# Altium PCB YingHuoDispaly.PcbDoc
Units mil, origin at the board's own origin, x right, y up, seen from the top; angles counter-clockwise.
Board outline 9842.52 x 1574.8 mil, 2 copper layers (Top Layer, Bottom Layer), stack 65.792 mil thick; 22 components, 10 nets, 58 pads, 112 vias.
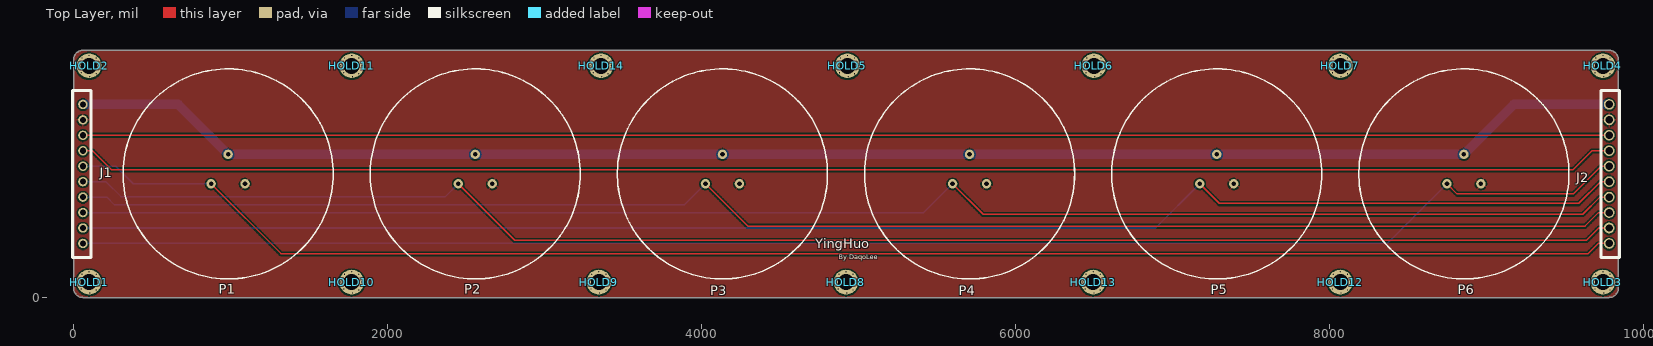
[diagram p0: Top Layer view]
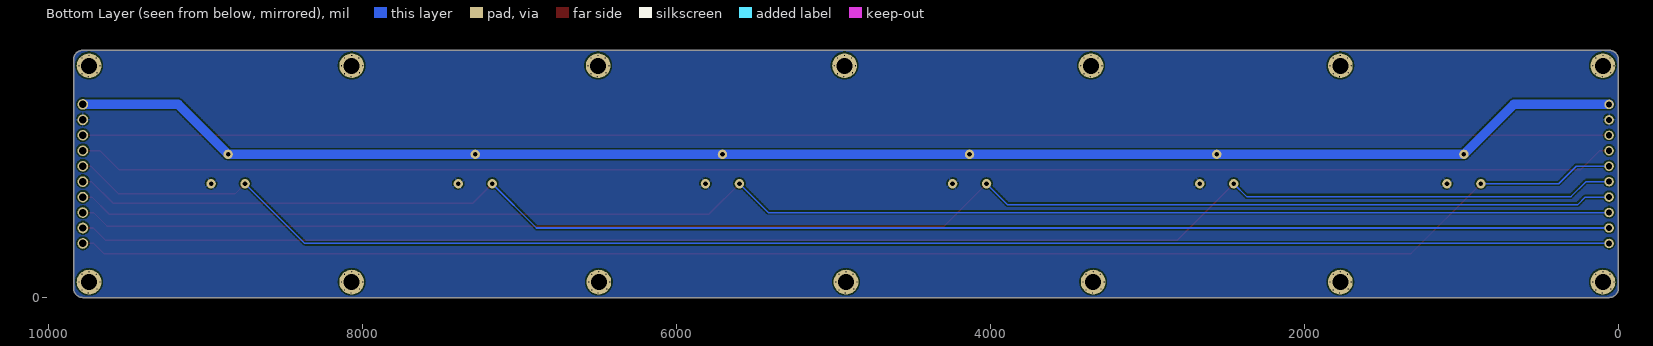
[diagram p1: Bottom Layer view, seen from below]
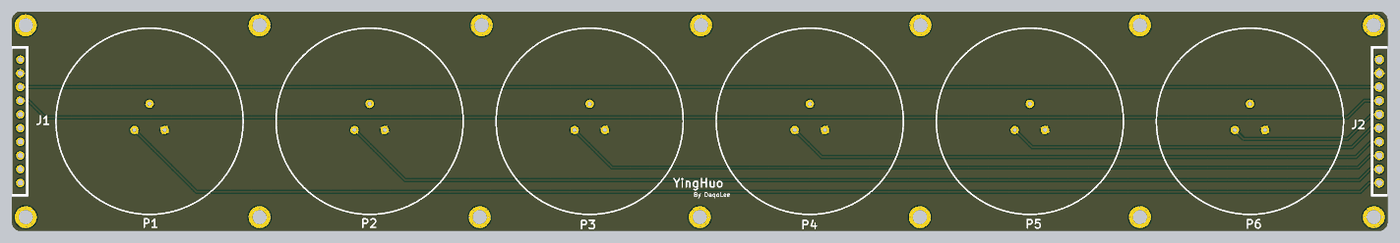
[diagram p2: 3D render of the assembled board from above, using the file's embedded part models]

## Layer stack, top to bottom
Top Solder: solder mask 0.4, Solder Resist, Dk 3.5
Top Layer: signal copper 1.4
Dielectric 1: dielectric 62.9921, FR-4, Dk 4.8
Bottom Layer: signal copper 1.4
Bottom Solder: solder mask 0.4, Solder Resist, Dk 3.5

## Board outline
0,59.06 0,1515.75 cw(c59.06,1515.75) 59.06,1574.8 9783.46,1574.8 cw(c9783.46,1515.75) 9842.52,1515.75 9842.52,59.06 cw(c9783.46,59.06) 9783.46,0 59.06,0 cw(c59.06,59.06)

## Design rules (kind name [scope] priority, off if disabled: settings)
Clearance [All] p1: gap=10 ignorepadtopadclearanceinfootprint=FALSE except(0: Arc-Hole Track-Hole SMDPad-Hole THPad-Hole Via-Hole Fill-Hole Poly-Hole Region-Hole Text-Hole)
PlaneClearance [All] p1: clearance=5
PolygonConnect [All] p1: connectstyle=Relief reliefconductorwidth=10 reliefentries=4 polygonreliefangle="90 Angle" airgapwidth=10
RoutingVias [All] p1: holewidth=28 width=50 viastyle="Through Hole" minholewidth=28 minwidth=50 maxholewidth=28 maxwidth=50
SolderMaskExpansion [All] p1: expansion=4
Width Width_1 [InNet('VCC')] p1: maxlimit=60 minlimit=10 preferedwidth=30
Width [All] p2: maxlimit=10 minlimit=10 preferedwidth=10
29 further rules are at their usual default settings.

## Components (designator, comment, footprint, x,y, rotation, side; value= is the part's Value field where it differs from the comment)
HOLD1 "M2.5" Hold_M2.5S 98.43,98.43 r90 top
HOLD2 "M2.5" Hold_M2.5S 98.43,1476.38 r90 top
HOLD3 "M2.5" Hold_M2.5S 9744.09,98.43 r90 top
HOLD4 "M2.5" Hold_M2.5S 9744.09,1476.38 r90 top
HOLD5 "M2.5" Hold_M2.5S 4930.43,1476.38 r90 top
HOLD6 "M2.5" Hold_M2.5S 6500.65,1476.38 r90 top
HOLD7 "M2.5" Hold_M2.5S 8070.87,1476.38 r90 top
HOLD8 "M2.5" Hold_M2.5S 4921.26,98.43 r90 top
HOLD9 "M2.5" Hold_M2.5S 3346.46,98.43 r90 top
HOLD10 "M2.5" Hold_M2.5S 1771.65,98.43 r90 top
HOLD11 "M2.5" Hold_M2.5S 1771.65,1476.38 r90 top
HOLD12 "M2.5" Hold_M2.5S 8070.87,98.43 r90 top
HOLD13 "M2.5" Hold_M2.5S 6496.06,98.43 r90 top
HOLD14 "M2.5" Hold_M2.5S 3360.22,1476.38 r90 top
J1 "J" JL-B01M-10#1 59.06,787.4 r90 top
J2 "J" JL-B01M-10#2 9783.46,787.4 r270 top
P1 "HDR1x3_1.27" YINGHUOPIN_3 984.25,787.4 r180 top
P2 "HDR1x3_1.27" YINGHUOPIN_3 2559.06,787.4 r180 top
P3 "HDR1x3_1.27" YINGHUOPIN_3 4133.86,787.4 r180 top
P4 "HDR1x3_1.27" YINGHUOPIN_3 5708.66,787.4 r180 top
P5 "HDR1x3_1.27" YINGHUOPIN_3 7283.46,787.4 r180 top
P6 "HDR1x3_1.27" YINGHUOPIN_3 8858.27,787.4 r180 top

## Footprints (in the part's own frame and the unit in brackets; to place one, negate y for a bottom-side part, rotate by r counter-clockwise, add the part's x,y. Pads: shape width x height; smd on the part's side, far side on the other; paste and mask are expansions set on the pad)
Hold_M2.5S [mm]
  round 4 hole 2.6: 0(0,0)
JL-B01M-10#1 [mil]
  round 60 hole 39.37: 1(-442.91,0) 2(-344.49,0) 3(-246.06,0) 4(-147.64,0) 5(-49.21,0) 6(49.21,0) 7(147.64,0) 8(246.06,0) 9(344.49,0) 10(442.91,0)
  silkscreen extent -531,-51 531,67, body extent -533,-51 2125,295, height 174
JL-B01M-10#2 [mil]
  round 67.87 hole 47.24: 1(-442.91,0) 2(-344.49,0) 3(-246.06,0) 4(-147.64,0) 5(-49.21,0) 6(49.21,0) 7(147.64,0) 8(246.06,0) 9(344.49,0) 10(442.91,0)
  silkscreen extent -531,-51 531,67, body extent -533,-51 2125,295, height 174
YINGHUOPIN_3 [mil]
  round 60 hole 30: 1(0,-125) 1(0,-125) 2(108.25,62.5) 3(-108.25,62.5)
  silkscreen extent -669,-669 669,669, body extent -229,-230 228,227, height 290

## Part data
HOLD1 HOLD2 HOLD3 HOLD4 HOLD5 HOLD6 HOLD7 HOLD8 HOLD9 HOLD10 HOLD11 HOLD12 HOLD13 HOLD14: library part Hold_M3
J1 J2: library part HDR1x10
P1 P2 P3 P4 P5 P6: "Header"

## Via types
v1: diameter 15.75, hole 7.87, Top Layer to Bottom Layer, tented both sides, 112 vias

## Nets (pads, with @x,y where several pads share a name; then routed paths per layer and width w, separated by ;. In a path a pad name is that pad's centre, name@x,y a point inside that pad or via, vN(x,y) a via of type N, cw(c..) or ccw(c..) an arc to the next point about the centre after c; other vN are vias at no path point)
GND: J1.9 J2.2 P1.3 P2.3 P3.3 P4.3 P5.3 P6.3
L1: J1.6 J2.10 P1.2 | length 9981.7
  Top Layer w10: P1.2 1320.9,280 9650,280 9714.49,344.49 J2.10
  Bottom Layer w10: J1.6 268.39,836.61 380.1,724.9 P1.2
L2: J1.5 J2.9 P2.2 | length 9979.1
  Top Layer w10: P2.2 2810.7,365 9640,365 9717.91,442.91 J2.9
  Bottom Layer w10: J1.5 206.81,738.19 302,643 2368.9,643 P2.2
L3: J1.4 J2.8 P3.2 | length 9948.5
  Top Layer w10: P3.2 4295.51,455 9630,455 9716.34,541.34 J2.8
  Bottom Layer w10: J1.4 210.24,639.76 260,590 3890.7,590 P3.2
L4: J1.3 J2.7 P4.2 | length 9926.6
  Top Layer w10: P4.2 5795.31,530 9615,530 9724.76,639.76 J2.7
  Bottom Layer w10: J1.3 5416.85,541.34 P4.2
L5: J1.2 J2.6 P5.2 | length 9950.2
  Top Layer w10: P5.2 7300.11,600 9590,600 9728.19,738.19 J2.6
  Bottom Layer w10: J1.2 6893.22,442.91 P5.2
L6: J1.1 J2.5 P6.2 | length 9982
  Top Layer w10: P6.2 8814.92,660 9555,660 9731.61,836.61 J2.5
  Bottom Layer w10: J1.1 8369.6,344.49 P6.2
N1: J1.7 J2.4 | length 9823.9
  Top Layer w10: J1.7 119.96,935.04 240,815 9555,815 9675.04,935.04 J2.4
N2: J1.8 J2.3 | length 9724.4
  Top Layer w10: J1.8 J2.3
VCC: J1.10 J2.1 P1.1 P2.1 P3.1 P4.1 P5.1 P6.1 | length 9987.8
  Bottom Layer w60: J1.10 666.34,1230.31 984.25,912.4 2559.06,912.4 4133.86,912.4 5708.66,912.4 7283.46,912.4 8858.27,912.4 9176.18,1230.31 J2.1
pads on no net: HOLD1.0 HOLD2.0 HOLD3.0 HOLD4.0 HOLD5.0 HOLD6.0 HOLD7.0 HOLD8.0 HOLD9.0 HOLD10.0 HOLD11.0 HOLD12.0 HOLD13.0 HOLD14.0
copper on no net:
  other v1: 103.43,28.43 1776.65,28.43 3351.46,28.43 4926.26,28.43 6501.06,28.43 8075.87,28.43 9749.09,28.43 143.43,48.43 1816.65,48.43 3391.46,48.43 4966.26,48.43 6541.06,48.43 8115.87,48.43 9789.09,48.43 48.43,53.43 1721.65,53.43 3296.46,53.43 4871.26,53.43 6446.06,53.43 8020.87,53.43 9694.09,53.43 28.43,98.43 163.43,98.43 1701.65,98.43 1836.65,98.43 3276.46,98.43 3411.46,98.43 4851.26,98.43 4986.26,98.43 6426.06,98.43 6561.06,98.43 8000.87,98.43 8135.87,98.43 9674.09,98.43 9809.09,98.43 53.43,148.43 143.43,148.43 1726.65,148.43 1816.65,148.43 3301.46,148.43 3391.46,148.43 4876.26,148.43 4966.26,148.43 6451.06,148.43 6541.06,148.43 8025.87,148.43 8115.87,148.43 9699.09,148.43 9789.09,148.43 98.43,163.43 1771.65,163.43 3346.46,163.43 4921.26,163.43 6496.06,163.43 8070.87,163.43 9744.09,163.43 103.43,1406.38 1776.65,1406.38 3365.22,1406.38 4935.43,1406.38 6505.65,1406.38 8075.87,1406.38 9749.09,1406.38 143.43,1426.38 1816.65,1426.38 3405.22,1426.38 4975.43,1426.38 6545.65,1426.38 8115.87,1426.38 9789.09,1426.38 48.43,1431.38 1721.65,1431.38 3310.22,1431.38 4880.43,1431.38 6450.65,1431.38 8020.87,1431.38 9694.09,1431.38 28.43,1476.38 163.43,1476.38 1701.65,1476.38 1836.65,1476.38 3290.22,1476.38 3425.22,1476.38 4860.43,1476.38 4995.43,1476.38 6430.65,1476.38 6565.65,1476.38 8000.87,1476.38 8135.87,1476.38 9674.09,1476.38 9809.09,1476.38 53.43,1526.38 143.43,1526.38 1726.65,1526.38 1816.65,1526.38 3315.22,1526.38 3405.22,1526.38 4885.43,1526.38 4975.43,1526.38 6455.65,1526.38 6545.65,1526.38 8025.87,1526.38 8115.87,1526.38 9699.09,1526.38 9789.09,1526.38 98.43,1541.38 1771.65,1541.38 3360.22,1541.38 4930.43,1541.38 6500.65,1541.38 8070.87,1541.38 9744.09,1541.38

## Polygon pours and split planes (outlines as drawn)
GND on Top Layer "Top Layer-GND" (hatched Horizontal grid 4 track 6, remove dead copper, pour order 12): 0,59.06 0,1515.75 cw(c59.06,1515.75) 59.06,1574.8 9783.46,1574.8 cw(c9783.46,1515.75) 9842.52,1515.75 9842.52,59.06 cw(c9783.46,59.06) 9783.46,0 59.06,0 cw(c59.06,59.06)
GND on Bottom Layer "Bottom Layer-GND" (hatched Horizontal grid 4 track 5, remove dead copper, pour order 10): 0,59.06 0,1515.75 cw(c59.06,1515.75) 59.06,1574.8 9783.46,1574.8 cw(c9783.46,1515.75) 9842.52,1515.75 9842.52,59.06 cw(c9783.46,59.06) 9783.46,0 59.06,0 cw(c59.06,59.06)

## Silkscreen, mask and mechanical layers (free items; w line width, h text height)
Top Overlay:
  text "YingHuo" at 4724.29,315 h60
  text "By DaqoLee" at 4874.29,245 h30
Mechanical 1:
  lines w10: 0,1515 0,59.06 ccw(c59.06,59.06) 59.06,0 9783.46,0 ccw(c9783.46,59.06) 9842.52,59.06 9842.52,1515.75 ccw(c9783.46,1515.75) 9783.46,1574.8 59.06,1574.8 ccw(c59.06,1515.75) 0,1515.75